# Altium PCB 主控转接板-V2.0.PcbDoc
Units mm, origin at the board's own origin, x right, y up, seen from the top; angles counter-clockwise.
Board outline 65 x 30 mm, 2 copper layers (Top Layer, Bottom Layer); 39 components, 21 nets, 155 pads, 78 vias.
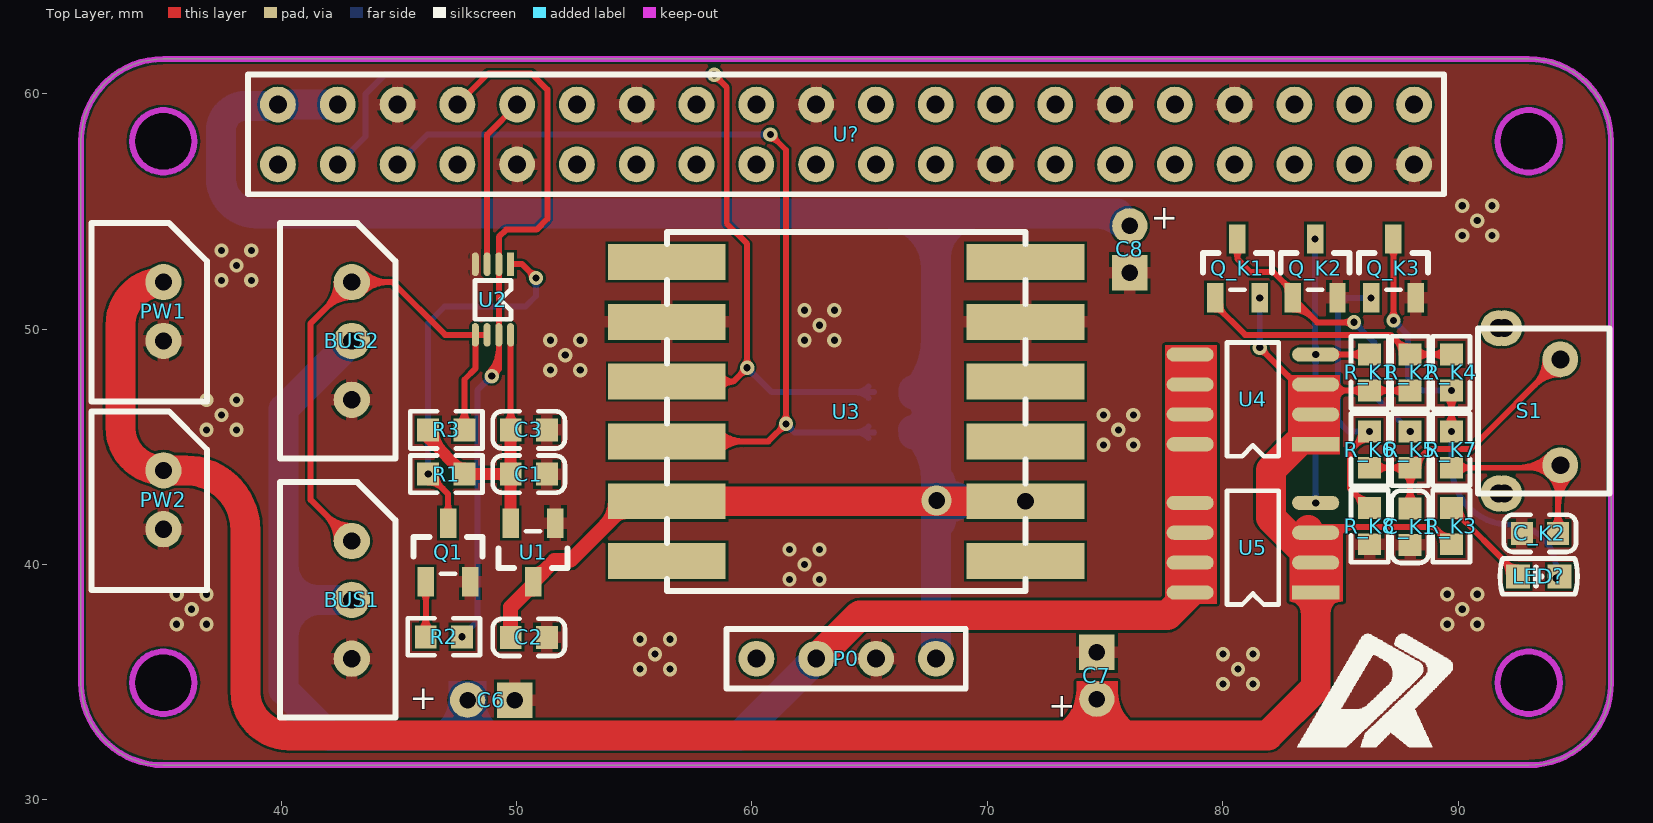
[diagram p0: Top Layer view]
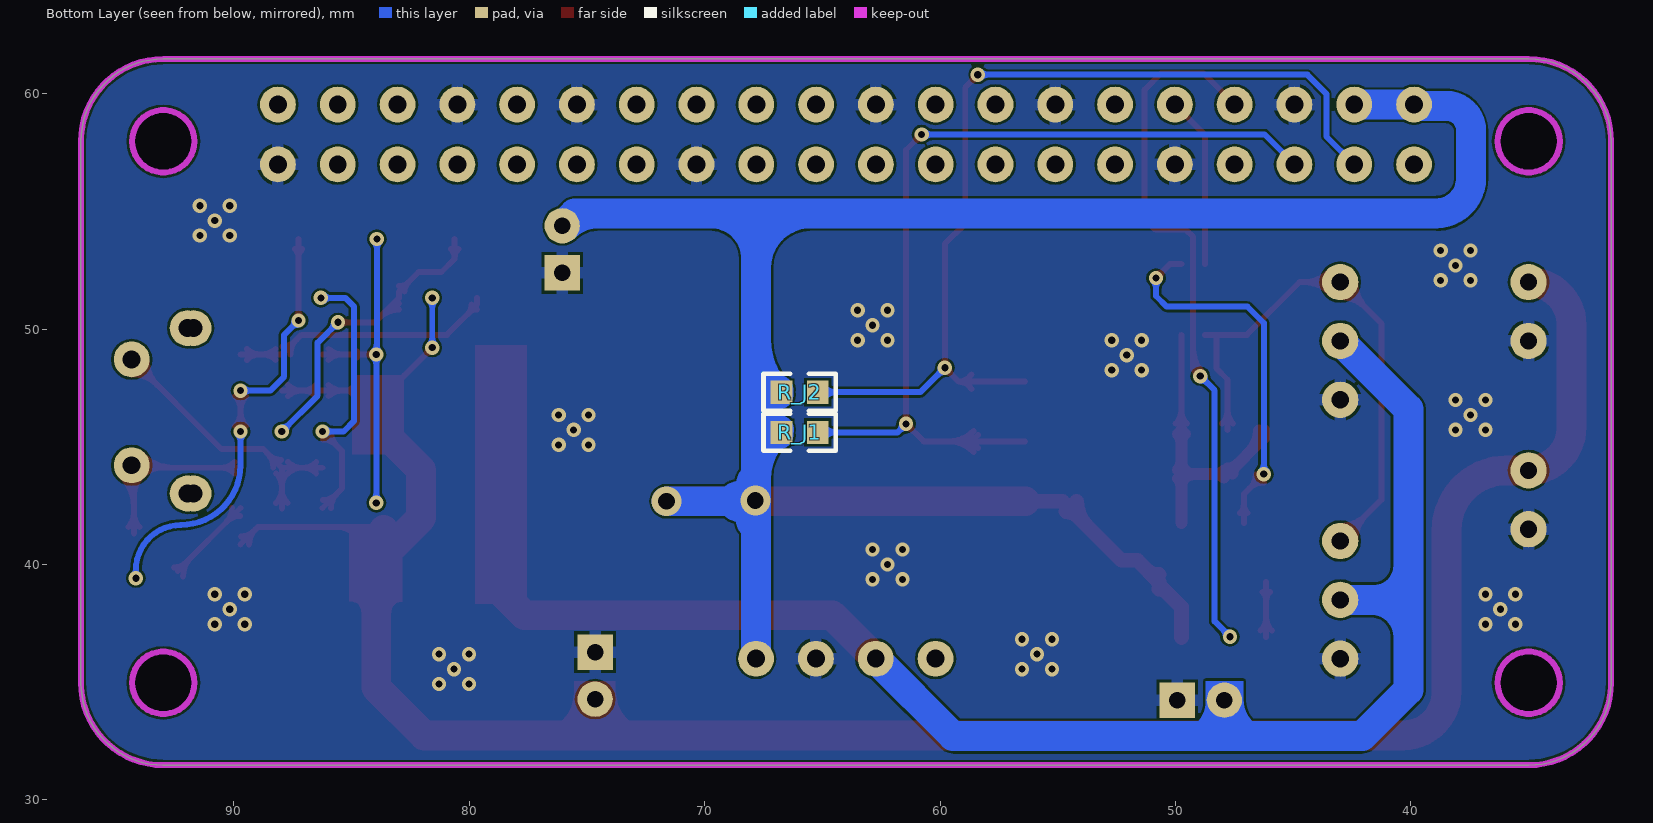
[diagram p1: Bottom Layer view, seen from below]
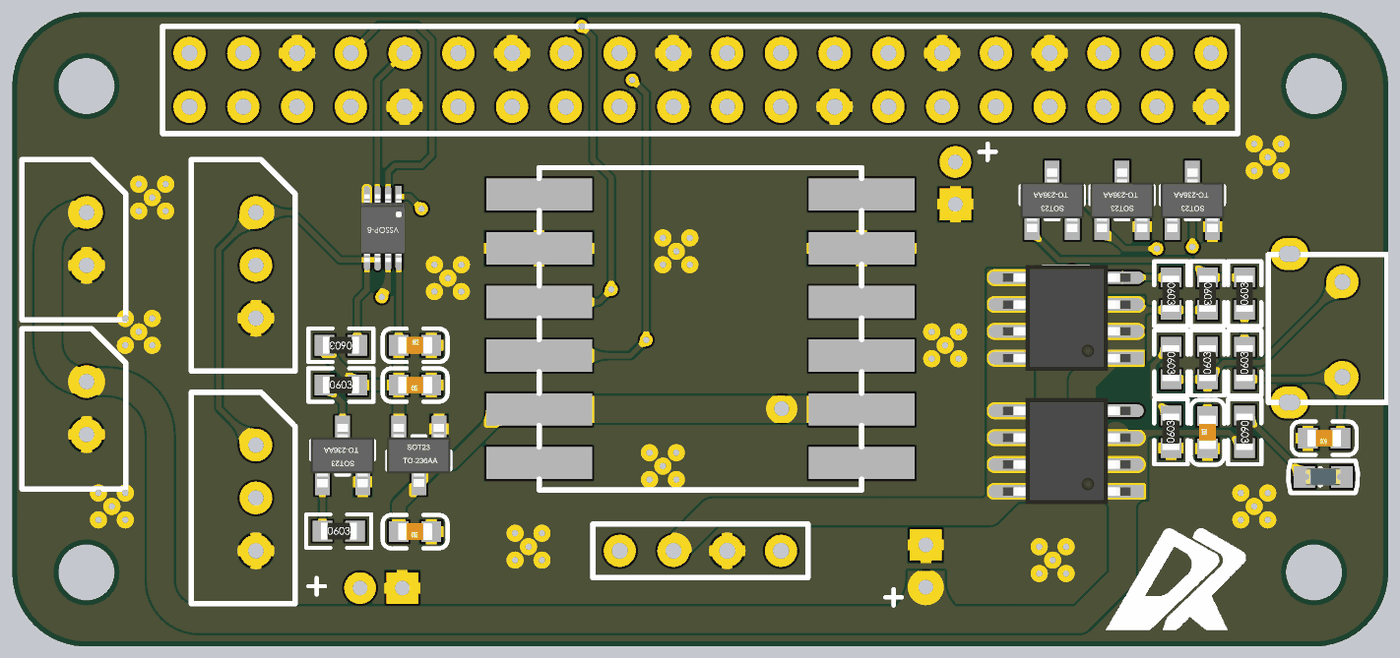
[diagram p2: 3D render of the assembled board from above, using the file's embedded part models]

## Layer stack, top to bottom
Top Solder: solder mask 0.0102, Solder Resist, Dk 3.5
Top Layer: signal copper 0.0356
Dielectric 1: dielectric 0.32, FR-4, Dk 4.8
Bottom Layer: signal copper 0.0356
Bottom Solder: solder mask 0.0102, Solder Resist, Dk 3.5

## Board outline
31.494,34.979 31.494,57.979 cw(c34.994,57.979) 34.994,61.479 92.994,61.479 cw(c92.994,57.979) 96.494,57.979 96.494,34.979 cw(c92.994,34.979) 92.994,31.479 34.994,31.479 cw(c34.994,34.979)
cut-out: 34.994,56.654 cw(c34.994,57.979) 33.669,57.979 cw(c34.994,57.979) 34.994,59.304 cw(c34.994,57.979) 36.319,57.979 cw(c34.994,57.979)
cut-out: 33.669,34.979 ccw(c34.994,34.979) 34.994,33.654 ccw(c34.994,34.979) 36.319,34.979 ccw(c34.994,34.979) 34.994,36.304 ccw(c34.994,34.979)
cut-out: 91.669,34.979 ccw(c92.994,34.979) 92.994,33.654 ccw(c92.994,34.979) 94.319,34.979 ccw(c92.994,34.979) 92.994,36.304 ccw(c92.994,34.979)
cut-out: 91.669,57.979 ccw(c92.994,57.979) 92.994,56.654 ccw(c92.994,57.979) 94.319,57.979 ccw(c92.994,57.979) 92.994,59.304 ccw(c92.994,57.979)

## Design rules (kind name [scope] priority, off if disabled: settings)
Clearance [All] p1: gap=0.102
HoleToHoleClearance [All] p1: gap=0.102 allowstackedmicrovias=TRUE
MinimumSolderMaskSliver [All] p1: minsoldermaskwidth=0
PolygonConnect PolygonConnect_1 [isvia] p1: connectstyle=Direct reliefconductorwidth=0.254 reliefentries=4 polygonreliefangle="90 Angle" airgapwidth=0.254
PolygonConnect [All] p2: connectstyle=Relief reliefconductorwidth=0.508 reliefentries=4 polygonreliefangle="90 Angle" airgapwidth=0.127
RoutingVias [All] p1: holewidth=0.711 width=1.27 viastyle="Through Hole" minholewidth=0.711 minwidth=1.27 maxholewidth=0.711 maxwidth=1.27
SilkToSilkClearance [All] p1: silktosilkclearance=0
SilkToSolderMaskClearance [IsPad] p1: minsilkscreentomaskgap=0 clearancetoexposedcopper=TRUE
SolderMaskExpansion [All] p1: expansion=0.102
Width [All] p1: maxlimit=2.54 minlimit=0.254 preferedwidth=1.27 minimp=50.000000 maximp=50.000000 favimp=50.000000
25 further rules are at their usual default settings.

## Classes and differential pairs
component class 主控转接板-V2.0: BUS1 BUS2 C1 C2 C3 C_K1 C_K2 LED? P0 PW1 PW2 Q1 Q_K1 Q_K2 Q_K3 R1 R2 R3 R_J1 R_J2 R_K1 R_K2 R_K3 R_K4 R_K5 R_K6 R_K7 R_K8 S1 U1 U2 U3 U4 U5 U?

## Components (designator, comment, footprint, x,y, rotation, side; value= is the part's Value field where it differs from the comment)
BUS1 "Header 3" 3P 43,41 r270 top
BUS2 "Header 3" 3P 43,52 r270 top
C1 "C0603" Cap_0603 50.521,43.84 r180 top
C2 "C0603" Cap_0603 50.521,36.906 r180 top
C3 "C0603" Cap_0603 50.521,45.72 r0 top
C6 "Comment" "EC 5x11x2mm" 48.92,34.239 r180 top
C7 "Comment" "EC 5x11x2mm" 74.651,35.281 r270 top
C8 "Comment" "EC 5x11x2mm" 76.048,53.391 r90 top
C_K1 "C0603" Cap_0603 87.96,41.605 r90 top
C_K2 "C0603" Cap_0603 93.472,41.326 r180 top
LED? "LED" LED_0603 93.421,39.497 r0 top
P0 "Header 4" MP2315GJ 60.19,36 r90 top
PW1 "Header_1X2" 2P 35,52 r270 top
PW2 "Header_1X2" 2P 35,44 r270 top
Q1 "S8050" LC-SOT-23(SOT-23-3) 47.092,40.513 r270 top
Q_K1 "S8550" LC-SOT-23(SOT-23-3) 80.62,52.578 r270 top
Q_K2 "KRC106S" LC-SOT-23(SOT-23-3) 83.922,52.578 r270 top
Q_K3 "S8050" LC-SOT-23(SOT-23-3) 87.249,52.578 r270 top
R1 "0603" Res_0603 47.015,43.84 r0 top
R2 "0603" Res_0603 46.914,36.932 r0 top
R3 "0603" Res_0603 47.015,45.72 r180 top
R_J1 "4.7k" Res_0603 65.964,45.618 r180 bottom
R_J2 "4.7k" Res_0603 65.964,47.32 r180 bottom
R_K1 "0603" Res_0603 86.233,48.158 r270 top
R_K2 "0603" Res_0603 87.96,48.158 r270 top
R_K3 "0603" Res_0603 89.713,41.631 r270 top
R_K4 "0603" Res_0603 89.713,48.158 r90 top
R_K5 "0603" Res_0603 87.96,44.882 r90 top
R_K6 "0603" Res_0603 86.233,44.882 r270 top
R_K7 "0603" Res_0603 89.713,44.882 r90 top
R_K8 "0603" Res_0603 86.233,41.631 r90 top
S1 "Buttom" "Touch Switch" 94.336,48.717 r270 top
U1 "XC6206P332MR (662K)" LC-SOT-23(SOT-23-3) 50.698,40.513 r90 top
U2 "SN74LVC2G126" VSSOP-8 48.997,51.257 r270 top
U3 "JY901" JY901 71.62,40.15 r180 top
U4 "AO4423" "SOP-8 1" 81.28,47.015 r180 top
U5 "AO4423" "SOP-8 1" 81.28,40.716 r180 top
U? "Raspberry Pi Zero W" "2.54 2*20PIN" 39.864,57 r90 top
? "Comment" LOGO2 83.16,32.258 r0 top

## Footprints (in the part's own frame and the unit in brackets; to place one, negate y for a bottom-side part, rotate by r counter-clockwise, add the part's x,y. Pads: shape width x height; smd on the part's side, far side on the other; paste and mask are expansions set on the pad)
"2.54 2*20PIN" [mil]
  round 60 hole 30: 1(0,0) 2(100,0) 3(0,-100) 4(100,-100) 5(0,-200) 6(100,-200) 7(0,-300) 8(100,-300) 9(0,-400) 10(100,-400) 11(0,-500) 12(100,-500) 13(0,-600) 14(100,-600) 15(0,-700) 16(100,-700) 17(0,-800) 18(100,-800) 19(0,-900) 20(100,-900) 21(0,-1000) 22(100,-1000) 23(0,-1100) 24(100,-1100) 25(0,-1200) 26(100,-1200) 27(0,-1300) 28(100,-1300) 29(0,-1400) 30(100,-1400) 31(0,-1500) 32(100,-1500) 33(0,-1600) 34(100,-1600) 35(0,-1700) 36(100,-1700) 37(0,-1800) 38(100,-1800) 39(0,-1900) 40(100,-1900)
  silkscreen extent -50,-1950 150,50
2P [mm]
  round 1.542 hole 0.73: 1(0,0) 2(2.5,0)
  silkscreen extent -2.5,-3.05 5.08,1.85, body extent -2.53,-3.07 4.97,1.83, height 6
3P [mm]
  round 1.542 hole 0.73: 1(0,0) 2(2.5,0) 3(5,0)
  silkscreen extent -2.5,-3.05 7.5,1.85, body extent -2.51,-3.1 7.49,1.8, height 6
Cap_0603 [mm]
  rect 0.93x0.98 smd: 1(-0.77,0) 2(0.77,0)
  silkscreen extent -1.53,-0.79 1.54,0.79, body extent -0.8,-0.4 0.8,0.4, height 0.3
"EC 5x11x2mm" [mm]
  rect 1.5x1.5 hole 0.7: 1(-1,0)
  round 1.5 hole 0.7: 2(1,0)
JY901 [mm]
  rect 5x1.524 smd: 1(0,0) 2(0,-2.54) 3(0,-5.08) 4(0,-7.62) 5(0,-10.16) 6(0,-12.7) 7(15.24,-12.7) 8(15.24,-10.16) 9(15.24,-7.62) 10(15.24,-5.08) 11(15.24,-2.54) 12(15.24,0)
  silkscreen extent 0,-13.97 15.24,1.27
LC-SOT-23(SOT-23-3) [mm]
  rect 1.25x0.7 smd: 1(1.25,-0.95) 2(1.25,0.95) 3(-1.25,0)
  silkscreen extent -0.65,-1.46 0.9,1.46, body extent -1.5,-1.5 1.5,1.5, height 1.3
LED_0603 [mil]
  rect 40x40 smd: A(-35,0) K(35,0)
  silkscreen extent -65,-30 65,30, body extent -32,-16 32,16, height 24
LOGO2 [mm]
  silkscreen extent 0,0 6.6,4.8
MP2315GJ [mil]
  round 60 hole 30: 1(0,-300) 2(0,-200) 3(0,-100) 4(0,0)
  silkscreen extent -50,-350 50,50
Res_0603 [mm]
  rect 0.93x0.98 smd: 1(-0.77,0) 2(0.77,0)
  silkscreen extent -1.53,-0.79 1.54,0.79, body extent -0.85,-0.4 0.85,0.4, height 0.56
"SOP-8 1" [mm]
  rect 2x0.6 smd: 1(-2.667,1.905)
  oval 2x0.6 smd: 2(-2.667,0.635) 3(-2.667,-0.635) 4(-2.667,-1.905) 5(2.667,-1.905) 6(2.667,-0.635) 7(2.667,0.635) 8(2.667,1.905)
  silkscreen extent -1.1,-2.41 1.1,2.41, body extent -3.05,-2.51 2.99,2.51, height 1.6
"Touch Switch" [mil]
  round 60 hole 30: 0(-52.17,-93.5) 0(-52.17,-103.35) 0(224.41,-103.35) 0(224.41,-93.5) 1(0,0) 2(177.17,0)
  silkscreen extent -51,-138 224,83
VSSOP-8 [mm]
  rect 1x0.3 smd: 1(-1.5,0.75)
  oval 1x0.3 smd: 2(-1.5,0.25) 3(-1.5,-0.25) 4(-1.5,-0.75) 5(1.5,-0.75) 6(1.5,-0.25) 7(1.5,0.25) 8(1.5,0.75)
  silkscreen extent -0.81,-0.76 0.84,0.76, body extent -1.6,-1.04 1.6,1.06, height 0.9

## Part data
BUS1 BUS2: "Header, 3-Pin"
C1 C2 C3 C_K1 C_K2: library part "Cap 1"
P0: "Header, 4-Pin"
Q1 Q_K2 Q_K3: library part NPN
Q_K1: library part PNP
R1 R2 R3 R_K1 R_K2 R_K3 R_K4 R_K5 R_K6 R_K7 R_K8: library part Res2
R_J1 R_J2: library part RES, "Resistor"

## Via types
v1: diameter 0.61, hole 0.305, Top Layer to Bottom Layer, 76 vias
v2: diameter 1.27, hole 0.711, Top Layer to Bottom Layer, 2 vias

## Nets (pads, with @x,y where several pads share a name; then routed paths per layer and width w, separated by ;. In a path a pad name is that pad's centre, name@x,y a point inside that pad or via, vN(x,y) a via of type N, cw(c..) or ccw(c..) an arc to the next point about the centre after c; other vN are vias at no path point)
3.3V: C1.2 C3.1 R1.2 R3.2 U1.2 U2.8 | length 19.6
  Top Layer w0.254: C3.1@49.512,45.984 ccw(c48.935,46.561) 49.751,46.561 ccw(c50.567,46.561) C3.1@49.99,45.984 ; U2.8 49.751,49.753 C3.1
  Top Layer w0.508: R3.2 46.245,45.38 R1.2 C1.2 ; R3.2@46.456,45.695 ccw(c47.725,45.695) 46.828,44.798 ; R1.2@47.383,44.243 ccw(c47.785,44.646) R1.2@47.785,44.076 ; R1.2@47.443,44.183 cw(c47.125,43.865) R1.2@47.574,43.865 ; R1.2@47.935,43.691 cw(c48.295,43.331) 48.295,43.84 cw(c48.295,44.35) R1.2@47.935,43.99 ; C1.2@49.601,43.666 cw(c49.241,43.306) 49.751,43.306 cw(c50.26,43.306) C1.2@49.9,43.666 ; C1.2@49.601,43.691 ccw(c49.241,43.331) 49.241,43.84 ccw(c49.241,44.35) C1.2@49.601,43.99 ; C1.2@49.601,44.015 ccw(c49.241,44.375) 49.751,44.375 ccw(c50.26,44.375) C1.2@49.9,44.015 ; C3.1@49.601,45.546 cw(c49.241,45.186) 49.751,45.186 cw(c50.26,45.186) C3.1@49.9,45.546 ; U1.2 49.751,41.765 C1.2 ; C3.1 C1.2
5.0V: C2.2 C8.2 P0.1 R_J1.1 R_J2.1 U1.3 U3.2 U3.11 U?.2 U?.4 | length 120.7
  Top Layer w0.635: C2.2 49.751,38.194 50.698,39.141 U1.3 51.618,40.183 52.299,40.183 54.806,42.69 U3.11 ; U1.3@50.381,38.824 cw(c50.698,38.507) U1.3@50.698,38.955 ; U1.3@50.698,39.57 ccw(c50.698,40.313) 51.223,39.788 ; 53.767,41.652 ccw(c52.729,42.69) U3.11@54.197,42.69 ; U3.11@54.163,42.047 cw(c54.642,41.568) U3.11@54.642,42.246
  Top Layer w1.27: U3.11 v2(71.62,42.69)
  Bottom Layer w1.27: U?.4 U?.2 cw(c39.81,59.54) 39.81,59.487 38.506,59.487 ccw(c38.506,58.42) 37.44,58.42 37.44,56.413 ccw(c38.938,56.413) 38.938,54.915 65.507,54.915 ; R_J1.1@66.842,45.724 cw(c65.135,43.665) 67.81,43.665 ; R_J1.1@66.854,45.523 ccw(c64.546,47.831) 67.81,47.831 ; R_J2.1@66.854,47.225 ccw(c64.546,49.533) 67.81,49.533 ; R_J2.1@66.854,47.415 cw(c64.546,45.107) 67.81,45.107 ; P0.1 67.81,41.326 ; 67.984,43.572 cw(c67.232,43.261) v2(67.843,42.723) ; 68.005,41.779 ccw(c67.199,42.126) v2(67.843,42.723) ; 68.66,42.486 cw(c68.404,43.13) v2(67.843,42.723) ; 68.692,42.864 ccw(c68.381,42.114) v2(67.843,42.723) ; v2(71.62,42.69) 69.174,42.69 ; 74.505,54.915 cw(c74.505,52.848) C8.2@75.966,54.309 ; C8.2 75.524,54.915 69.723,54.915 ; 65.507,54.915 cw(c65.507,52.611) 67.81,52.611 ; 65.507,54.915 69.723,54.915 ; 67.81,41.326 cw(c69.174,41.326) 69.174,42.69 ; 67.81,41.326 67.81,43.993 ; 67.81,43.993 ccw(c69.113,43.993) 69.113,42.69 69.174,42.69 ; 67.81,43.993 67.81,52.611 ; 67.81,52.611 67.81,53.002 cw(c69.723,53.002) 69.723,54.915
BUS: BUS1.1 BUS2.1 R3.1 U2.5 U2.6 | length 36.4
  Top Layer w0.254: BUS1.1@42.356,41 ccw(c40.801,41) 41.901,42.099 ccw(c43,43.199) BUS1.1@43,41.644 ; BUS2.1@42.356,52 cw(c40.801,52) 41.901,50.901 cw(c43,49.801) BUS2.1@43,51.356 ; BUS1.1@42.61,41 ccw(c41.668,41) 42.334,41.666 ccw(c43,42.332) BUS1.1@43,41.39 ; BUS2.1@42.61,52 cw(c41.668,52) 42.334,51.334 cw(c43,50.668) BUS2.1@43,51.61 ; BUS1.1 41.25,42.75 41.25,50.25 BUS2.1 44.723,52 46.966,49.757 U2.5 ; BUS2.1@43.276,51.724 cw(c43.942,51.058) 43.942,52 cw(c43.942,52.942) BUS2.1@43.276,52.276 ; BUS2.1@43.455,51.545 cw(c44.555,50.445) 44.555,52 cw(c44.555,53.555) BUS2.1@43.455,52.455 ; R3.1@47.546,45.984 ccw(c46.969,46.561) 47.785,46.561 ccw(c48.601,46.561) R3.1@48.024,45.984 ; R3.1 47.785,47.862 48.247,48.323 U2.5 ; U2.6 U2.5
EN: P0.4
GND: BUS1.3 BUS2.3 C1.1 C2.1 C3.2 C6.1 C7.1 C8.1 C_K1.1 C_K2.2 P0.2 PW1.2 PW2.2 Q1.2 Q_K2.2 Q_K3.2 R_K8.1 U1.1 U2.4 U3.5 U3.8 U?.6 U?.9 U?.14 U?.20 U?.25 U?.30 U?.34 U?.39
  other v1: 80.01,34.925 81.28,34.925 55.245,35.56 56.515,35.56 80.645,35.56 55.88,36.195 80.01,36.195 81.28,36.195 55.245,36.83 56.515,36.83 35.56,37.465 36.83,37.465 89.535,37.465 90.805,37.465 36.195,38.1 90.17,38.1 35.56,38.735 36.83,38.735 89.535,38.735 90.805,38.735 61.595,39.37 62.865,39.37 62.23,40.005 61.595,40.64 62.865,40.64 74.93,45.085 76.2,45.085 36.83,45.72 38.1,45.72 75.565,45.72 37.465,46.355 74.93,46.355 76.2,46.355 36.83,46.99 38.1,46.99 51.435,48.26 52.705,48.26 52.07,48.895 51.435,49.53 52.705,49.53 62.23,49.53 63.5,49.53 62.865,50.165 62.23,50.8 63.5,50.8 37.465,52.07 38.735,52.07 38.1,52.705 37.465,53.34 38.735,53.34 90.17,53.975 91.44,53.975 90.805,54.61 90.17,55.245 91.44,55.245
I2C_SCL: R_J1.2 U3.10 U?.5 | length 46.7
  Top Layer w0.254: U3.10 60.699,45.23 v1(61.443,45.974) 61.443,57.607 v1(60.782,58.268) ; U3.10@58.387,44.961 cw(c59.038,44.31) 59.038,45.23 cw(c59.038,46.15) U3.10@58.387,45.499 ; U3.10@58.567,44.781 cw(c59.651,43.697) 59.651,45.23 cw(c59.651,46.763) U3.10@58.567,45.679 ; v1@60.782,58.09 cw(c60.782,57.661) 61.086,57.964 cw(c61.389,58.268) v1@60.96,58.268 ; v1@61.265,45.974 cw(c60.836,45.974) 61.139,45.67 cw(c61.443,45.367) v1@61.443,45.796 ; v1@61.317,46.1 ccw(c61.013,46.403) 61.443,46.403 ccw(c61.872,46.403) v1@61.568,46.1
  Bottom Layer w0.254: U?.5 46.211,58.268 v1(60.782,58.268) ; v1@60.656,58.142 ccw(c60.353,57.838) 60.353,58.268 ccw(c60.353,58.697) v1@60.656,58.393 ; v1@61.443,45.796 cw(c61.443,45.367) 61.746,45.67 cw(c62.05,45.974) v1@61.62,45.974 ; v1(61.443,45.974) 61.798,45.618 R_J1.2 ; R_J1.2@64.955,45.379 ccw(c64.378,44.802) 64.378,45.618 ccw(c64.378,46.434) R_J1.2@64.955,45.857
I2C_SDA: R_J2.2 U3.9 U?.3 | length 47.1
  Top Layer w0.254: U3.9 59.2,47.77 ; v1@58.395,60.63 cw(c58.395,60.201) 58.698,60.504 cw(c59.002,60.808) v1@58.572,60.808 ; v1(58.395,60.808) 58.928,60.274 58.928,54.483 59.792,53.619 v1(59.792,48.362) 59.2,47.77 ; U3.9@58.672,47.46 cw(c59.2,47.166) 59.2,47.77 ; U3.9@58.672,48.08 ccw(c59.2,48.374) 59.2,47.77 ; v1@59.614,48.362 cw(c59.185,48.362) 59.488,48.058 cw(c59.792,47.755) v1@59.792,48.184 ; v1@59.666,48.487 ccw(c59.362,48.791) 59.792,48.791 ccw(c60.221,48.791) v1@59.917,48.487
  Bottom Layer w0.254: U?.3 43.586,58.183 43.586,59.995 44.399,60.808 v1(58.395,60.808) ; v1@58.269,60.682 ccw(c57.965,60.378) 57.965,60.808 ccw(c57.965,61.237) v1@58.269,60.933 ; v1@59.792,48.184 cw(c59.792,47.755) 60.095,48.058 cw(c60.399,48.362) v1@59.969,48.362 ; v1(59.792,48.362) 60.833,47.32 R_J2.2 ; R_J2.2@64.955,47.081 ccw(c64.378,46.504) 64.378,47.32 ccw(c64.378,48.136) R_J2.2@64.955,47.559
NetC_K1_2: C_K1.2 R_K5.1 R_K6.2 S1.1 | length 22
  Top Layer w0.254: R_K6.2 R_K5.1 ; R_K6.2@86.497,43.873 cw(c87.074,43.296) 87.074,44.112 cw(c87.074,44.928) R_K6.2@86.497,44.351 ; R_K5.1@87.696,43.873 ccw(c87.119,43.296) 87.119,44.112 ccw(c87.119,44.928) R_K5.1@87.696,44.351 ; C_K1.2@87.721,42.614 ccw(c87.144,43.191) 87.96,43.191 ccw(c88.776,43.191) C_K1.2@88.199,42.614 ; R_K5.1@87.721,43.873 cw(c87.144,43.296) 87.96,43.296 cw(c88.776,43.296) R_K5.1@88.199,43.873 ; C_K1.2 R_K5.1 ; R_K5.1@87.985,44.45 ccw(c87.985,45.205) 88.52,44.671 ; R_K5.1@88.323,44.112 cw(c89.2,44.112) 88.58,44.731 ; S1.1@93.701,48.717 cw(c92.168,48.717) 93.252,47.633 cw(c94.336,46.549) S1.1@94.336,48.082 ; S1.1@93.955,48.717 cw(c93.035,48.717) 93.685,48.067 cw(c94.336,47.416) S1.1@94.336,48.336 ; S1.1 90.526,44.907 88.756,44.907 R_K5.1
NetC_K2_1: C_K2.1 R_K7.1 S1.2 | length 16.8
  Top Layer w0.254: R_K7.1 94.23,44.112 S1.2@94.242,44.124 ; R_K7.1@89.977,43.873 cw(c90.554,43.296) 90.554,44.112 cw(c90.554,44.928) R_K7.1@89.977,44.351 ; 92.548,44.112 ccw(c92.548,46.005) S1.2@93.887,44.666 ; 93.057,44.112 cw(c93.057,42.939) 93.887,43.768 cw(c93.029,42.91) 94.242,42.91 ; 93.161,44.112 ccw(c93.161,45.391) S1.2@94.066,44.487 ; C_K2.1@94.003,41.59 ccw(c93.426,42.167) 94.242,42.167 ccw(c95.058,42.167) C_K2.1@94.481,41.59 ; C_K2.1 S1.2@94.242,44.124 ; 94.242,42.458 cw(c96.095,42.458) S1.2@94.785,43.768 ; 94.242,43.071 cw(c95.481,43.071) S1.2@94.605,43.948 ; S1.2 S1.2@94.242,44.124
NetLED?_A: LED?.A R_K3.1 | length 6.5
  Top Layer w0.254: R_K3.1 LED?.A@92.38,39.734 ; R_K3.1@89.738,42.063 cw(c89.738,41.307) 90.272,41.841 ; R_K3.1@90.076,42.401 ccw(c90.952,42.401) 90.332,41.781 ; 91.822,40.291 cw(c91.028,39.497) LED?.A@92.151,39.497 ; 92.026,40.088 ccw(c92.532,40.595) LED?.A@92.532,39.878
NetLED?_K: LED?.K Q_K3.3 R_K4.1 R_K7.2 | length 26.7
  Top Layer w0.254: Q_K3.3@87.091,53.395 cw(c86.711,53.015) 87.249,53.015 cw(c87.787,53.015) Q_K3.3@87.407,53.395 ; v1@87.123,50.494 ccw(c86.82,50.797) 87.249,50.797 ccw(c87.678,50.797) v1@87.375,50.494 ; v1(87.249,50.368) Q_K3.3 ; R_K7.2@89.474,45.891 ccw(c88.897,46.468) 89.713,46.468 ccw(c90.529,46.468) R_K7.2@89.952,45.891 ; R_K4.1@89.474,47.149 cw(c88.897,46.572) 89.713,46.572 cw(c90.529,46.572) R_K4.1@89.952,47.149 ; R_K7.2@89.587,45.778 ccw(c89.284,46.081) 89.713,46.081 ccw(c90.142,46.081) R_K7.2@89.839,45.778 ; R_K4.1@89.587,47.263 cw(c89.284,46.959) 89.713,46.959 cw(c90.142,46.959) R_K4.1@89.839,47.263 ; v1(89.713,45.652) v1(89.713,47.388)
  Bottom Layer w0.254: v1@87.249,50.19 cw(c87.249,49.761) 87.553,50.065 cw(c87.856,50.368) v1@87.427,50.368 ; v1(87.249,50.368) 87.859,49.759 87.859,47.981 88.451,47.388 v1(89.713,47.388) ; v1@89.587,45.526 cw(c89.284,45.223) 89.713,45.223 cw(c90.142,45.223) v1@89.839,45.526 ; v1@89.587,47.263 ccw(c89.284,46.959) 89.284,47.388 ccw(c89.284,47.818) v1@89.587,47.514 ; v1(89.713,45.652) 89.713,44.221 ccw(c92.253,44.221) 92.253,41.681 cw(c92.253,39.776) 94.158,39.776 ; v1@94.051,39.563 ccw(c93.891,39.776) 94.158,39.776 ; v1(94.158,39.421) 94.158,39.776 ; v1@94.264,39.563 cw(c94.424,39.776) 94.158,39.776
NetQ1_1: Q1.1 R2.1 | length 4.5
  Top Layer w0.254: R2.1@45.905,37.196 ccw(c45.328,37.773) 46.144,37.773 ccw(c46.96,37.773) R2.1@46.383,37.196 ; Q1.1@45.984,38.83 cw(c45.598,38.444) 46.144,38.444 ; R2.1 Q1.1@46.144,39.261 ; 46.144,38.455 cw(c46.675,38.455) Q1.1@46.299,38.83
NetQ_K1_1: Q_K1.1 R_K2.1 R_K4.2 | length 15.9
  Top Layer w0.254: Q_K1.1@79.67,50.83 cw(c79.67,50.326) 80.026,50.682 ; Q_K1.1 79.67,51.039 80.95,49.759 87.13,49.759 R_K2.1 R_K4.2 ; Q_K1.1@79.893,51.053 ccw(c80.465,51.053) 80.06,50.648 ; 87.341,49.548 cw(c86.721,48.928) R_K2.1@87.597,48.928 ; 87.401,49.488 ccw(c87.935,50.022) R_K2.1@87.935,49.266 ; R_K2.1@88.224,48.689 cw(c88.801,48.112) 88.801,48.928 cw(c88.801,49.744) R_K2.1@88.224,49.167 ; R_K4.2@89.449,48.689 ccw(c88.872,48.112) 88.872,48.928 ccw(c88.872,49.744) R_K4.2@89.449,49.167
NetQ_K1_3: Q_K1.3 Q_K2.1 R_K5.2 | length 17.8
  Top Layer w0.254: Q_K1.3@80.462,53.395 cw(c80.081,53.015) 80.62,53.015 cw(c81.158,53.015) Q_K1.3@80.777,53.395 ; Q_K1.3 80.62,52.984 81.178,52.426 82.144,52.426 82.972,51.598 Q_K2.1 84.008,50.292 v1(85.573,50.292) ; 82.582,51.988 ccw(c82.972,52.377) Q_K2.1@82.972,51.826 ; 82.595,51.974 cw(c82.223,51.603) Q_K2.1@82.749,51.603 ; Q_K2.1@82.972,50.83 cw(c82.972,49.628) 83.822,50.478 ; Q_K2.1@82.972,51.084 cw(c82.972,50.495) 83.388,50.911 ; v1@85.447,50.166 ccw(c85.143,49.863) 85.143,50.292 ccw(c85.143,50.721) v1@85.447,50.418
  Bottom Layer w0.254: v1@85.573,50.114 cw(c85.573,49.685) 85.876,49.988 cw(c86.18,50.292) v1@85.75,50.292 ; v1(85.573,50.292) 86.436,49.428 86.436,47.176 v1(87.96,45.652) ; v1@87.782,45.652 ccw(c87.353,45.652) 87.657,45.955 ccw(c87.96,46.259) v1@87.96,45.83
NetQ_K2_3: Q_K2.3 R_K1.1 U4.4 U5.4 | length 18.8
  Top Layer w0.254: U4.4@83.947,48.928 R_K1.1 ; U4.4@84.073,48.795 cw(c84.396,48.472) U4.4@84.396,48.928 ; U4.4@84.073,49.046 ccw(c84.357,49.33) U4.4@84.357,48.928 ; U4.4@84.769,48.798 cw(c85.084,48.483) 85.084,48.928 ; U4.4@84.769,49.043 ccw(c85.045,49.319) 85.045,48.928 ; R_K1.1@85.969,48.689 ccw(c85.392,48.112) 85.392,48.928 ccw(c85.392,49.744) R_K1.1@85.969,49.167
  Bottom Layer w0.254: v1@83.796,53.702 cw(c83.492,53.399) 83.922,53.399 cw(c84.351,53.399) v1@84.047,53.702 ; v1@83.821,42.747 ccw(c83.518,43.05) 83.947,43.05 ccw(c84.376,43.05) v1@84.073,42.747 ; v1@83.821,48.795 cw(c83.518,48.491) 83.947,48.491 cw(c84.376,48.491) v1@84.073,48.795 ; v1@83.821,49.046 ccw(c83.579,49.288) 83.922,49.288 ; 83.922,49.411 ccw(c84.438,49.411) v1@84.073,49.046 ; v1(83.922,53.828) 83.922,48.946 v1(83.947,48.92) v1(83.947,42.621)
NetQ_K3_1: Q_K3.1 R_K6.1 R_K8.2 | length 16.5
  Top Layer w0.254: 85.613,43.02 cw(c84.994,42.401) R_K8.2@85.87,42.401 ; 85.613,45.032 ccw(c84.994,45.652) R_K6.1@85.87,45.652 ; 85.674,42.96 ccw(c86.208,43.494) R_K8.2@86.208,42.739 ; 85.674,45.092 cw(c86.208,44.558) R_K6.1@86.208,45.314 ; R_K6.1@86.055,45.652 cw(c85.626,45.652) 85.929,45.348 cw(c86.233,45.045) R_K6.1@86.233,45.474 ; R_K8.2 85.395,43.239 85.395,44.814 v1(86.233,45.652)
  Bottom Layer w0.254: v1@86.107,45.526 ccw(c85.804,45.223) 85.804,45.652 ccw(c85.804,46.081) v1@86.107,45.778 ; v1@86.173,51.202 ccw(c85.87,50.899) 85.87,51.328 ccw(c85.87,51.757) v1@86.173,51.454 ; v1(86.233,45.652) 85.336,45.652 84.887,46.101 84.887,50.952 85.262,51.328 v1(86.299,51.328)
RX: U2.3 U?.10 | length 7.3
  Top Layer w0.254: U2.3 48.747,58.263 U?.10
TX: R2.2 U2.2 U2.7 U?.8 | length 34
  Top Layer w0.254: U?.8 48.802,60.858 50.622,60.858 51.308,60.173 51.308,54.686 50.851,54.229 49.555,54.229 49.247,53.92 U2.2 U2.7 49.247,48.307 ; v1@48.82,48.132 ccw(c47.79,49.161) 49.247,49.161 ; v1(48.946,48.006) 49.247,48.307 ; v1@48.947,48.184 ccw(c48.95,48.604) 49.247,48.307 ; v1@49,47.952 ccw(c48.404,48.548) 49.247,48.548 ; v1@49.124,48.007 cw(c49.544,48.01) 49.247,48.307
  Bottom Layer w0.254: v1(47.684,36.932) 48.336,37.584 48.336,47.396 v1(48.946,48.006) ; v1@47.684,37.109 ccw(c47.684,37.539) 47.987,37.235 ccw(c48.291,36.932) v1@47.862,36.932 ; v1@48.768,48.006 cw(c48.339,48.006) 48.642,47.702 cw(c48.946,47.399) v1@48.946,47.828
TX1: Q1.3 R1.1 U2.1 | length 20.8
  Top Layer w0.254: R1.1@46.245,43.477 cw(c46.245,42.601) 46.865,43.221 ; R1.1@46.245,43.663 cw(c46.245,43.233) 46.549,43.537 cw(c46.852,43.84) R1.1@46.423,43.84 ; v1(46.245,43.84) 47.092,42.994 Q1.3 ; R1.1@46.583,43.815 ccw(c47.339,43.815) 46.805,43.281 ; Q1.3@46.934,42.196 ccw(c46.553,42.576) 47.092,42.576 ccw(c47.63,42.576) Q1.3@47.249,42.196 ; U2.1 50.24,52.757 v1(50.825,52.172) ; v1@50.648,52.172 ccw(c50.218,52.172) 50.522,52.475 ccw(c50.825,52.779) v1@50.825,52.349
  Bottom Layer w0.254: v1@46.12,43.966 ccw(c45.816,44.27) 46.245,44.27 ccw(c46.675,44.27) v1@46.371,43.966 ; v1(46.245,43.84) 46.245,50.259 46.939,50.952 50.368,50.952 50.825,51.41 v1(50.825,52.172) ; v1@50.7,52.046 cw(c50.396,51.742) 50.825,51.742 cw(c51.255,51.742) v1@50.951,52.046
VCC_IN: C7.2 PW1.1 PW2.1 Q_K1.2 R_K1.2 R_K2.2 R_K3.2 U4.1 U4.2 U4.3 U5.1 U5.2 U5.3 | length 107.4
  Top Layer w0.254: v1@81.57,49.037 cw(c81.57,48.608) 81.873,48.911 cw(c82.177,49.215) v1@81.747,49.215 ; v1(81.57,49.215) 82.906,47.879 ccw(c83.1,48.073) U4.3@83.19,47.814 ; 82.759,48.025 ccw(c83.247,48.513) U4.3@83.247,47.823 ; U4.3 ccw(c84.209,47.65) 84.209,47.388 85.242,47.388 ; U4.3@84.086,47.471 ccw(c84.199,47.508) U4.3@84.199,47.388 ; U4.3@84.328,47.549 ccw(c84.547,47.619) U4.3@84.547,47.388 ; U4.3@84.57,47.626 ccw(c84.895,47.729) 84.895,47.388 ; U5.3@84.59,41.408 cw(c85.065,40.934) 85.065,41.605 ; U5.3@84.769,41.229 cw(c85.678,40.32) 85.678,41.605 ; 84.811,41.605 88.968,41.605 R_K3.2 ; U4.3@84.812,47.703 ccw(c85.242,47.84) 85.242,47.388 ; U4.3@84.836,47.795 ccw(c85.242,47.795) 85.242,47.388 ; 84.861,47.007 cw(c85.242,47.007) 85.242,47.388 ; R_K1.2@85.969,47.149 ccw(c85.392,46.572) 85.392,47.388 ccw(c85.392,48.204) R_K1.2@85.969,47.627 ; R_K1.2@86.497,47.149 cw(c87.074,46.572) 87.074,47.388 cw(c87.074,48.204) R_K1.2@86.497,47.627 ; R_K2.2@87.696,47.149 ccw(c87.119,46.572) 87.119,47.388 ccw(c87.119,48.204) R_K2.2@87.696,47.627 ; R_K2.2 R_K1.2 85.242,47.388 ; 89.093,41.48 cw(c88.473,40.861) R_K3.2@89.35,40.861 ; 89.153,41.42 ccw(c89.688,41.954) R_K3.2@89.688,41.199
  Top Layer w1.27: PW1.1 ccw(c35,50.172) 33.172,50.172 33.172,45.828 ccw(c35,45.828) PW2.1 35.941,44 cw(c35.941,41.46) 38.481,41.46 38.481,34.595 ccw(c40.335,34.595) 40.335,32.741 81.915,32.741 83.947,34.773 U5.1 cw(c83.947,38.76) U5.1@83.998,38.76 ; U4.1@83.134,45.11 82.042,44.018 82.042,41.986 U5.2 cw(c84.889,41.024) U5.3@83.631,41.461 ; 83.324,40.704 cw(c82.701,40.081) U5.2@83.582,40.081
  Bottom Layer w0.254: v1@81.444,49.341 ccw(c81.14,49.644) 81.57,49.644 ccw(c81.999,49.644) v1@81.695,49.341 ; v1@81.444,51.202 cw(c81.14,50.899) 81.57,50.899 cw(c81.999,50.899) v1@81.695,51.202 ; v1(81.57,49.215) v1(81.57,51.328)
VCC_OUT: BUS1.2 BUS2.2 C6.2 P0.3 U4.5 U4.6 U4.7 U4.8 U5.5 U5.6 U5.7 U5.8 | length 64.7
  Top Layer w1.27: P0.3 64.576,37.846 77.648,37.846 U5.8 ; 77.99,38.188 ccw(c77.367,38.811) U5.8@78.248,38.811
  Bottom Layer w1.27: BUS1.2 41.675,38.5 ; BUS2.2 40.107,46.607 40.107,39.954 ; P0.3 59.445,32.715 42.062,32.715 40.107,34.671 40.107,36.932 ; 40.107,36.932 cw(c41.675,36.932) 41.675,38.5 ; 40.107,36.932 40.107,39.954 ; 40.107,39.954 ccw(c41.561,39.954) 41.561,38.5 41.675,38.5
pads on no net: S1.0 U3.1 U3.3 U3.4 U3.6 U3.7 U3.12 U?.1 U?.7 U?.11 U?.12 U?.13 U?.15 U?.16 U?.17 U?.18 U?.19 U?.21 U?.22 U?.23 U?.24 U?.26 U?.27 U?.28 U?.29 U?.31 U?.32 U?.33 U?.35 U?.36 U?.37 U?.38 U?.40

## Polygon pours and split planes (outlines as drawn)
GND on Top Layer "top-GND" (solid, remove dead copper, pour order 4): 31.494,57.979 31.494,58.907 cw(c34.034,58.907) 34.034,61.447 34.444,61.447 cw(c34.466,61.447) 34.466,61.468 93.268,61.468 93.954,61.468 cw(c93.954,58.928) 96.494,58.928 96.494,57.979 96.483,57.979 96.483,34.704 96.483,34.03 cw(c93.943,34.03) 93.943,31.49 93.268,31.49 34.719,31.49 34.044,31.49 cw(c34.044,34.03) 31.504,34.03 31.504,34.704
GND on Bottom Layer "top-GND" (solid, remove dead copper, pour order 6): 31.483,57.979 31.483,58.928 cw(c34.023,58.928) 34.023,61.468 34.719,61.468 93.268,61.468 93.954,61.468 cw(c93.954,58.928) 96.494,58.928 96.494,57.979 96.483,57.979 96.483,34.704 96.483,34.008 cw(c93.943,34.008) 93.943,31.468 92.994,31.468 34.994,31.468 34.044,31.468 cw(c34.044,34.008) 31.504,34.008 31.504,34.704

## Keep-outs
Keep-Out Layer:
  circle w0.254: c92.994,57.979 r1.325
  circle w0.254: c92.994,34.979 r1.325
  circle w0.254: c34.994,34.979 r1.325
  circle w0.254: c34.994,57.979 r1.325
  lines w0.254: 31.494,34.979 ccw(c34.994,34.979) 34.994,31.479 92.994,31.479 ccw(c92.994,34.979) 96.494,34.979 96.494,57.979 ccw(c92.994,57.979) 92.994,61.479 34.994,61.479 ccw(c34.994,57.979) 31.494,57.979 31.494,34.979

## Other copper
Top Layer:
  rectangle net VCC_OUT: 77.546,38.329 79.756,49.327
  rectangle net VCC_IN: 82.779,44.679 84.988,48.057
  rectangle net VCC_IN: 82.829,38.43 85.115,41.732
  rectangle net VCC_IN: 73.787,33.376 75.54,35.052
  region net VCC_IN: 85.014,38.43 ccw(c85.014,37.998) 84.582,37.998 84.582,38.43
  region net VCC_IN: 82.829,38.43 cw(c82.829,37.948) 83.312,37.948 83.312,38.43
  region net VCC_IN: 73.787,34.725 cw(c71.879,34.725) 73.228,33.376 73.787,33.376
  region net VCC_IN: 75.54,34.602 ccw(c77.274,34.602) 76.048,33.376 75.54,33.376
Bottom Layer:
  rectangle net VCC_OUT: 47.117,33.325 48.717,35.052
  region net 5.0V: 66.675,47.803 ccw(c66.675,48.311) 67.183,48.311 67.183,47.803
  region net 5.0V: 66.827,46.838 cw(c66.827,46.482) 67.183,46.482 67.183,46.838
  region net 5.0V: 66.802,46.101 ccw(c66.802,46.482) 67.183,46.482 67.183,46.101
  region net 5.0V: 66.802,45.136 cw(c66.802,44.755) 67.183,44.755 67.183,45.136
  region net VCC_OUT: 47.117,34.27 cw(c45.816,34.27) 46.736,33.35 47.056,33.35 cw(c47.056,33.263) 47.117,33.325
  region net VCC_OUT: 48.717,34.086 ccw(c49.758,34.086) 49.022,33.35 48.779,33.35 ccw(c48.779,33.263) 48.717,33.325

## Text inside footprints (layer, text, board x,y; h text height)
C6: Top Overlay "+" at 46.634,34.722 h1.02 r180
C7: Top Overlay "+" at 72.731,34.563 h1.02 r270
C8: Top Overlay "+" at 77.967,54.108 h1.02 r90